# Altium PCB DUT_STM32H753VIT6.PcbDoc
Units mm, origin at the board's own origin, x right, y up, seen from the top; angles counter-clockwise.
Board outline 33 x 90 mm, 2 copper layers (Top Layer, Bottom Layer); 11 components, 93 nets, 288 pads, 0 vias.
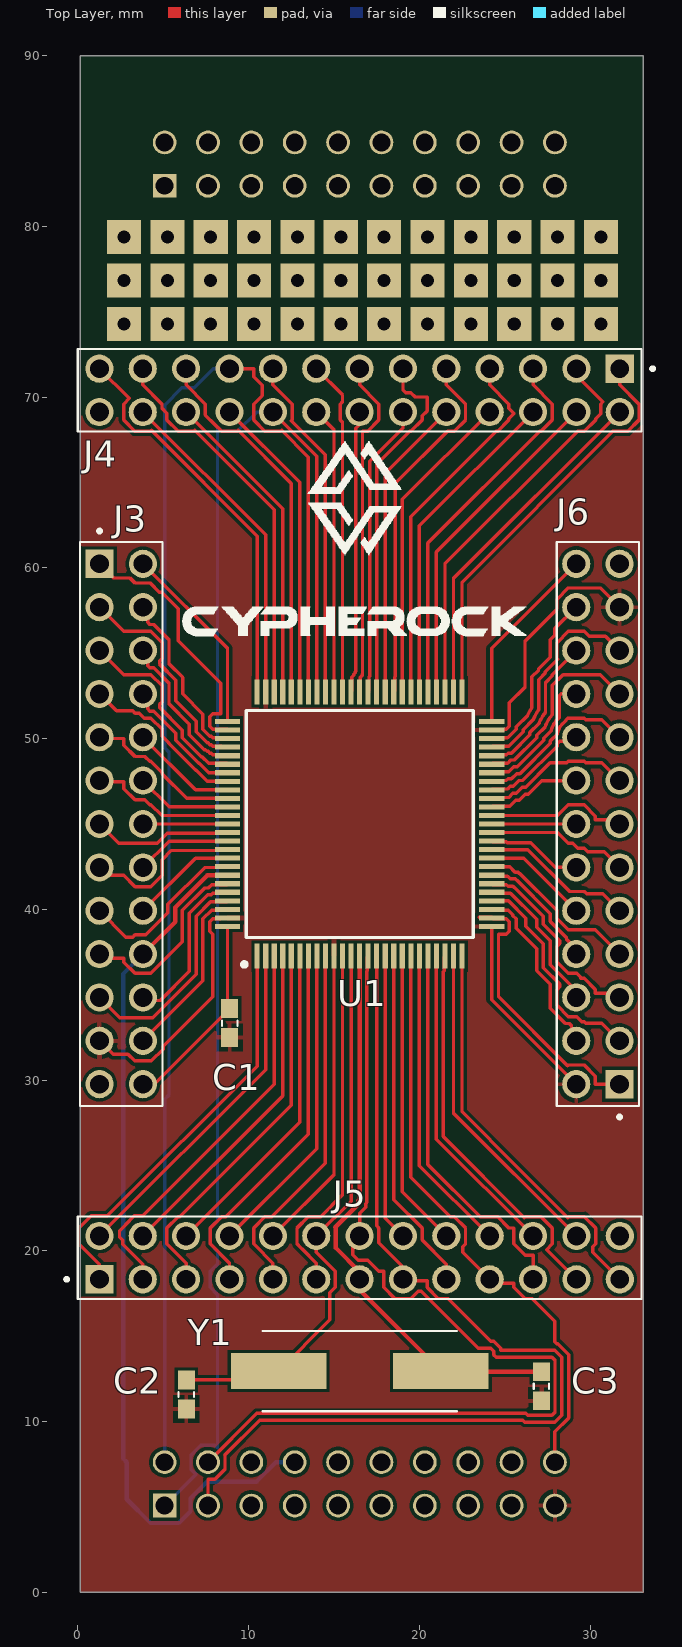
[diagram p0: Top Layer view]
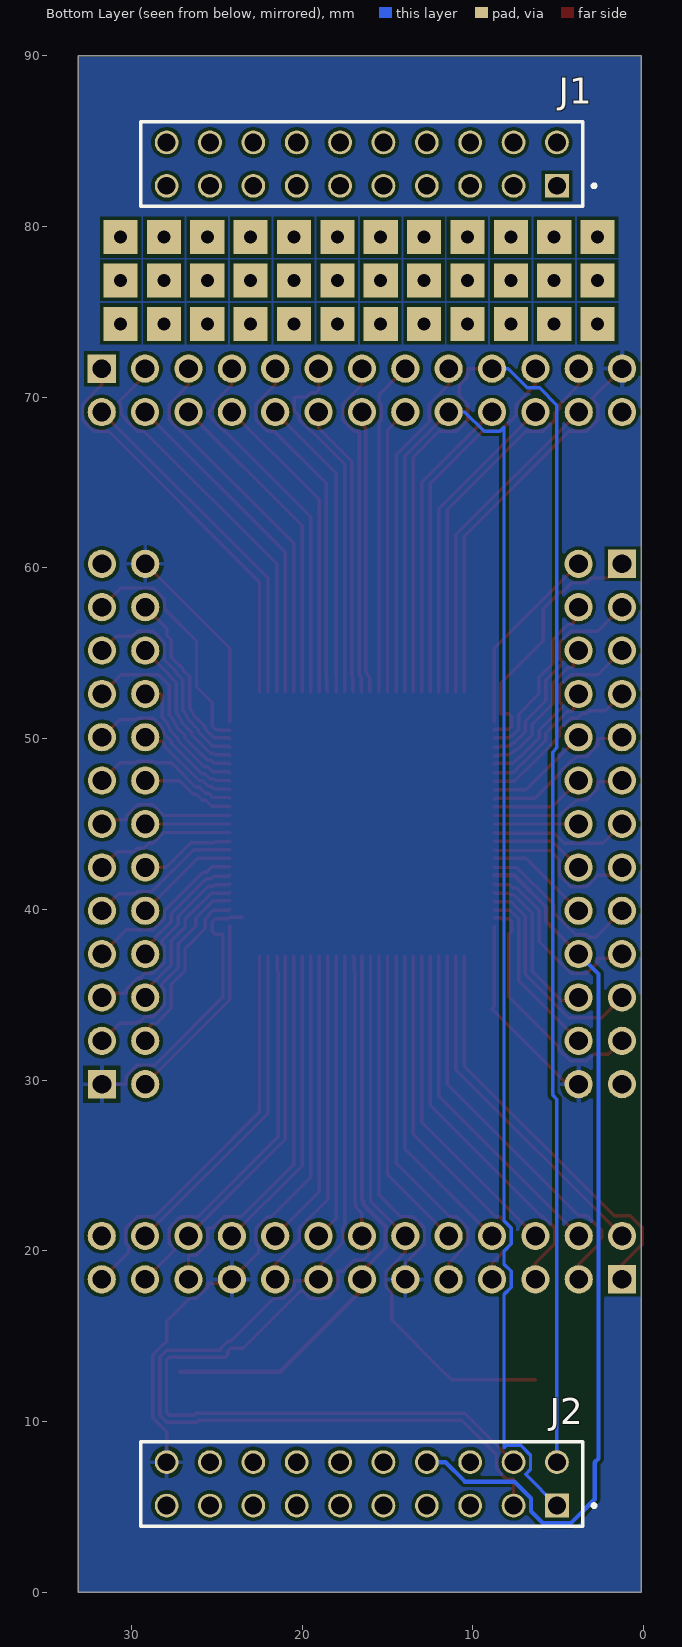
[diagram p1: Bottom Layer view, seen from below]
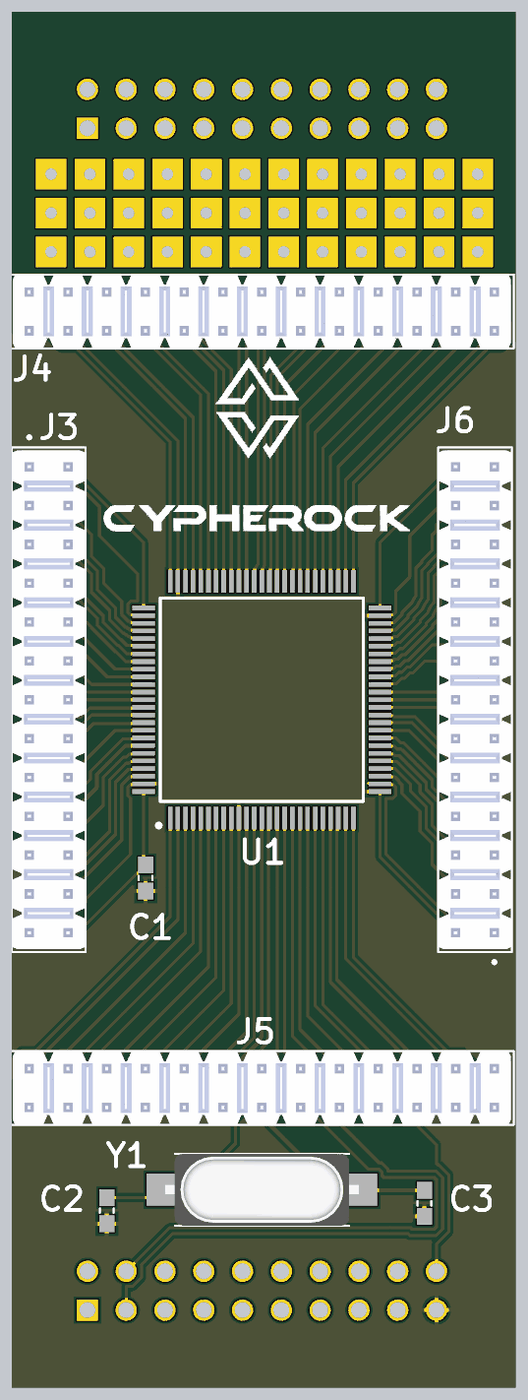
[diagram p2: 3D render of the assembled board from above, using the file's embedded part models]

## Layer stack, top to bottom
Top Solder: solder mask 0.0102, Solder Resist, Dk 3.5
Top Layer: signal copper 0.0356
Dielectric 1: dielectric 0.32, FR-4, Dk 4.8
Bottom Layer: signal copper 0.0356
Bottom Solder: solder mask 0.0102, Solder Resist, Dk 3.5

## Board outline
0.127,0 0.127,90 33.127,90 33.127,0

## Design rules (kind name [scope] priority, off if disabled: settings)
Clearance [All] p1: gap=0.2 ignorepadtopadclearanceinfootprint=FALSE
PolygonConnect [All] p1: connectstyle=Relief reliefconductorwidth=0.254 reliefentries=4 polygonreliefangle="90 Angle" airgapwidth=0.254
RoutingVias [All] p1: holewidth=0.711 width=1.27 viastyle="Through Hole" minholewidth=0.711 minwidth=1.27 maxholewidth=0.711 maxwidth=1.27
SolderMaskExpansion [All] p1: expansion=0.102 istentingtop=FALSE
Width [All] p1: maxlimit=0.254 minlimit=0.2 preferedwidth=0.254 minimp=50.000000 maximp=50.000000 favimp=50.000000
30 further rules are at their usual default settings.

## Components (designator, comment, footprint, x,y, rotation, side; value= is the part's Value field where it differs from the comment)
C1 "0.1uF" CAPC1608X90 8.89,33.337 r270 top
C2 "27pF" CAPC1608X90 6.35,11.589 r90 top
C3 "27pF" CAPC1608X90 27.146,12.065 r90 top
J1 "SSW-110-01-G-D-LL" SAMTEC_SSW-110-01-G-D-LL 5.08,82.38 r180 bottom
J2 "SSW-110-01-G-D-LL" SAMTEC_SSW-110-01-G-D-LL 5.08,5.08 r180 bottom
J3 "77313-818-26LF" AMPHENOL_77313-818-26LF 2.54,45 r270 top locked
J4 "77313-818-26LF" AMPHENOL_77313-818-26LF 16.5,70.4 r180 top
J5 "77313-818-26LF" AMPHENOL_77313-818-26LF 16.5,19.6 r0 top
J6 "77313-818-26LF" AMPHENOL_77313-818-26LF 30.46,45 r90 top
U1 "STM32H753VIT6" QFP50P1600X1600X160-100N 16.5,45 r90 top locked
Y1 "ABLS-8.000MHZ-B2-T" XTAL_ABLS-8.000MHZ-B2-T 16.51,12.954 r0 top

## Footprints (in the part's own frame and the unit in brackets; to place one, negate y for a bottom-side part, rotate by r counter-clockwise, add the part's x,y. Pads: shape width x height; smd on the part's side, far side on the other; paste and mask are expansions set on the pad)
AMPHENOL_77313-818-26LF [mm]
  rect 1.65x1.65 / inner round 1.65 / far side rect 1.65x1.65 hole 1.1: 01(-15.24,-1.27)
  round 1.65 hole 1.1: 02(-15.24,1.27) 03(-12.7,-1.27) 04(-12.7,1.27) 05(-10.16,-1.27) 06(-10.16,1.27) 07(-7.62,-1.27) 08(-7.62,1.27) 09(-5.08,-1.27) 10(-5.08,1.27) 11(-2.54,-1.27) 12(-2.54,1.27) 13(0,-1.27) 14(0,1.27) 15(2.54,-1.27) 16(2.54,1.27) 17(5.08,-1.27) 18(5.08,1.27) 19(7.62,-1.27) 20(7.62,1.27) 21(10.16,-1.27) 22(10.16,1.27) 23(12.7,-1.27) 24(12.7,1.27) 25(15.24,-1.27) 26(15.24,1.27)
  silkscreen extent -17.26,-2.41 16.51,2.41, body extent -16.31,-2.41 16.31,2.41, height 8.37
CAPC1608X90 [mm]
  rect 1.1x1 smd: 1(-0.85,0) 2(0.85,0)
  silkscreen extent -0.15,-0.45 0.15,0.45
QFP50P1600X1600X160-100N [mm]
  rect 1.475x0.3 smd: 1(-7.738,6) 2(-7.738,5.5) 3(-7.738,5) 4(-7.738,4.5) 5(-7.738,4) 6(-7.738,3.5) 7(-7.738,3) 8(-7.738,2.5) 9(-7.738,2) 10(-7.738,1.5) 11(-7.738,1) 12(-7.738,0.5) 13(-7.738,0) 14(-7.738,-0.5) 15(-7.738,-1) 16(-7.738,-1.5) 17(-7.738,-2) 18(-7.738,-2.5) 19(-7.738,-3) 20(-7.738,-3.5) 21(-7.738,-4) 22(-7.738,-4.5) 23(-7.738,-5) 24(-7.738,-5.5) 25(-7.738,-6) 51(7.738,-6) 52(7.738,-5.5) 53(7.738,-5) 54(7.738,-4.5) 55(7.738,-4) 56(7.738,-3.5) 57(7.738,-3) 58(7.738,-2.5) 59(7.738,-2) 60(7.738,-1.5) 61(7.738,-1) 62(7.738,-0.5) 63(7.738,0) 64(7.738,0.5) 65(7.738,1) 66(7.738,1.5) 67(7.738,2) 68(7.738,2.5) 69(7.738,3) 70(7.738,3.5) 71(7.738,4) 72(7.738,4.5) 73(7.738,5) 74(7.738,5.5) 75(7.738,6)
  rect 0.3x1.475 smd: 26(-6,-7.738) 27(-5.5,-7.738) 28(-5,-7.738) 29(-4.5,-7.738) 30(-4,-7.738) 31(-3.5,-7.738) 32(-3,-7.738) 33(-2.5,-7.738) 34(-2,-7.738) 35(-1.5,-7.738) 36(-1,-7.738) 37(-0.5,-7.738) 38(0,-7.738) 39(0.5,-7.738) 40(1,-7.738) 41(1.5,-7.738) 42(2,-7.738) 43(2.5,-7.738) 44(3,-7.738) 45(3.5,-7.738) 46(4,-7.738) 47(4.5,-7.738) 48(5,-7.738) 49(5.5,-7.738) 50(6,-7.738) 76(6,7.738) 77(5.5,7.738) 78(5,7.738) 79(4.5,7.738) 80(4,7.738) 81(3.5,7.738) 82(3,7.738) 83(2.5,7.738) 84(2,7.738) 85(1.5,7.738) 86(1,7.738) 87(0.5,7.738) 88(0,7.738) 89(-0.5,7.738) 90(-1,7.738) 91(-1.5,7.738) 92(-2,7.738) 93(-2.5,7.738) 94(-3,7.738) 95(-3.5,7.738) 96(-4,7.738) 97(-4.5,7.738) 98(-5,7.738) 99(-5.5,7.738) 100(-6,7.738)
  silkscreen extent -8.35,-6.65 6.65,6.87
SAMTEC_SSW-110-01-G-D-LL [mm]
  rect 1.39x1.39 hole 1.04: 01(0,0)
  round 1.39 hole 1.04: 02(0,2.54) 03(-2.54,0) 04(-2.54,2.54) 05(-5.08,0) 06(-5.08,2.54) 07(-7.62,0) 08(-7.62,2.54) 09(-10.16,0) 10(-10.16,2.54) 11(-12.7,0) 12(-12.7,2.54) 13(-15.24,0) 14(-15.24,2.54) 15(-17.78,0) 16(-17.78,2.54) 17(-20.32,0) 18(-20.32,2.54) 19(-22.86,0) 20(-22.86,2.54)
  silkscreen extent -24.39,-1.21 2.27,3.75
XTAL_ABLS-8.000MHZ-B2-T [mm]
  rect 5.6x2.1 smd: 1(-4.75,0) 2(4.75,0)
  silkscreen extent -5.7,-2.35 5.7,2.35, body extent -6.35,-2.35 6.35,2.35, height 4.06

## Part data
C1: library part CC0603MRX5R7BB106, "CAP CER 10UF 16V X5R 0603", Package=None, Availability=Unavailable, MP=CC0603MRX5R7BB106, Price=None
C2 C3: library part CC0603MRX5R7BB106, "0603", Package=None, Availability=Unavailable, MP=CC0603MRX5R7BB106, Price=None
J1 J2: Package=None, Availability=Unavailable, MF="Samtec Inc.", MP=SSW-110-01-G-D-LL, Price=None
J3 J4 J5 J6: "BergStik, Board to Board connector, Unshrouded Header, 2.54 mm Pitch, Vertical, Double Row,Through Hole, 26 Positions", Package=None, Check_prices=https://www.snapeda.com/parts/77313-818-26LF/Amphenol+FCI/view-part/?ref=eda, MF="Amphenol ICC (FCI)", MP=77313-818-26LF, SnapEDA_Link=https://www.snapeda.com/parts/77313-818-26LF/Amphenol+FCI/view-part/?ref=snap
U1: "ARM Microcontrollers - MCU High-performance and DSP with DP-FPU, ARM Cortex-M7 MCU with 2MBytes Flash, 1MB RAM, 400 MHz CPU, Art Accelerator, L1 cache, external memory interface, large set of peripherals including a Crypto accelerator", Manufacturer_Name=STMicroelectronics, Mouser Part Number=511-STM32H753VIT6, Datasheet Link=https://www.st.com/resource/en/datasheet/stm32h753vi.pdf, Geometry.Height=1.6mm, Manufacturer_Part_Number=STM32H753VIT6, Mouser Price/Stock=https://www.mouser.co.uk/ProductDetail/STMicroelectronics/STM32H753VIT6?qs=u4fy%2FsgLU9OfOK8gAGKF5w%3D%3D
Y1: "HC/49US (AT49) SMD LOW PROFILE CRYSTAL", Package="HC49/US Abracon", Availability="In Stock", Check_prices=https://www.snapeda.com/parts/ABLS-8.000MHZ-B2-T/Abracon+LLC/view-part/?ref=eda, MF="Abracon LLC", MP=ABLS-8.000MHZ-B2-T, Price=None, Purchase-URL=https://pricing.snapeda.com/search/part/ABLS-8.000MHZ-B2-T/?ref=eda, SnapEDA_Link=https://www.snapeda.com/parts/ABLS-8.000MHZ-B2-T/Abracon+LLC/view-part/?ref=snap

## Free pads (board coordinates)
  rect 2x2 hole 0.762: 17(2.699,74.295) 17(2.699,76.835) 17(2.699,79.375) 17(5.239,74.295) 17(5.239,76.835) 17(5.239,79.375) 17(7.779,74.295) 17(7.779,76.835) 17(7.779,79.375) 17(10.319,74.295) 17(10.319,76.835) 17(10.319,79.375) 17(12.859,74.295) 17(12.859,76.835) 17(12.859,79.375) 17(15.399,74.295) 17(15.399,76.835) 17(15.399,79.375) 17(17.939,74.295) 17(17.939,76.835) 17(17.939,79.375) 17(20.479,74.295) 17(20.479,76.835) 17(20.479,79.375) 17(23.019,74.295) 17(23.019,76.835) 17(23.019,79.375) 17(25.559,74.295) 17(25.559,76.835) 17(25.559,79.375) 17(28.099,74.295) 17(28.099,76.835) 17(28.099,79.375) 17(30.639,74.295) 17(30.639,76.835) 17(30.639,79.375)

## Nets (pads, with @x,y where several pads share a name; then routed paths per layer and width w, separated by ;. In a path a pad name is that pad's centre, name@x,y a point inside that pad or via, vN(x,y) a via of type N, cw(c..) or ccw(c..) an arc to the next point about the centre after c; other vN are vias at no path point)
3V3: C1.1 J2.20 J3.26 J4.25 J5.11 J5.19 J6.01 J6.26 U1.11 U1.19 U1.27 U1.50 U1.75 U1.100 | length 119.1
  Top Layer w0.2: J4.25 3.005,69.925 2.675,69.596 2.675,68.664 3.334,68.005 4.266,68.005 4.313,68.052 10.5,61.864 U1.75 ; J3.26 4.462,29.76 C1.1 8.762,34.316 U1.100 ; J5.11 13.96,19.279 13.127,20.112 13.048,20.191 12.835,20.404 12.835,21.336 13.494,21.995 14.216,21.995 15.5,23.279 U1.11 ; U1.19 19.5,24.315 21.82,21.995 22.046,21.995 22.705,21.336 22.705,20.404 22.543,20.242 22.543,19.907 J5.19 24.352,18.098 25.535,18.098 25.535,17.864 26.194,17.205 26.61,17.205 27.94,15.875 27.94,14.682 28.057,14.565 28.102,14.565 28.746,13.921 28.746,10.209 27.94,9.403 J2.20 ; 23.495,39.55 24.238,39.55 24.338,39.45 25.1,39.45 25.276,39.274 25.276,38.726 25.1,38.55 24.638,38.55 24.638,34.878 28.677,30.838 28.724,30.885 29.656,30.885 30.315,30.226 30.315,29.76 J6.01 ; U1.50 24.238,55.288 J6.26
GND: J2.17
GNDA: C1.2 C2.1 C3.1 J2.19 J3.23 J4.24 J5.10 J6.02 J6.23 U1.10 U1.26 U1.49 U1.74 U1.99 | length 77
  Top Layer w0.2: J3.23 2.061,31.509 2.934,31.509 3.322,31.121 4.298,31.121 4.989,31.812 4.989,31.973 7.9,34.885 7.9,38.55 7.724,38.726 7.724,39.274 7.9,39.45 8.335,39.45 8.385,39.5 U1.99 ; J4.24 11,61.93 U1.74 ; J5.10 15,24.45 U1.10 ; U1.26 24.238,34.712 J6.02 ; U1.49 24.941,50.5 24.991,50.55 25.1,50.55 25.276,50.726 25.276,52.104 26.188,53.016 26.188,55.715 28.065,57.593 28.065,58.166 28.724,58.825 30.605,58.825 J6.23
NetC2_2: C2.2 J5.12 U1.12 Y1.1 | length 32.6
  Top Layer w0.2: C2.2 11.245,12.439 Y1.1 14.764,15.958 14.764,17.543 15.085,17.864 15.085,18.796 14.718,19.163 13.96,19.921 J5.12 16,22.91 U1.12
NetC3_2: C3.2 J5.13 U1.13 Y1.2 | length 33.4
  Top Layer w0.254: U1.13 16.5,23.009 16.427,22.936 16.427,22.733 15.077,21.383 15.112,21.347 15.112,20.161 16.5,18.773 J5.13 16.5,17.714 Y1.2 21.299,12.915 C3.2
NetJ2_01: J2.01 J4.18 U1.68 | length 87.4
  Top Layer w0.2: J4.18 14,66.55 U1.68
  Bottom Layer w0.2: J2.01 6.916,6.916 6.625,7.208 6.625,8.032 7.208,8.615 8.032,8.615 8.179,8.468 8.179,17.44 7.755,17.864 7.755,18.796 8.179,19.22 8.179,19.98 7.755,20.404 7.755,21.336 8.179,21.76 8.179,68.24 8.414,68.005 9.346,68.005 10.471,69.13 J4.18
NetJ2_02: J2.02 J4.19 U1.69 | length 89.5
  Top Layer w0.2: J4.19 10.295,71.67 10.295,71.204 10.795,70.704 10.795,70.096 10.295,69.596 10.295,68.664 10.954,68.005 11.886,68.005 11.933,68.052 13.5,66.484 U1.69
  Bottom Layer w0.2: J2.02 5.08,28.873 5.335,29.128 5.335,49.203 5.08,49.458 5.08,69.532 6.092,70.545 6.806,70.545 7.931,71.67 J4.19
NetJ2_03: J2.03 J5.15 U1.15 | length 58.9
  Top Layer w0.2: J2.03 7.62,6.625 8.032,6.625 8.615,7.208 8.615,8.032 8.606,8.041 10.643,10.078 26.063,10.078 26.176,9.965 27.936,9.965 28.346,10.375 28.346,12.075 28.346,13.755 27.936,14.165 24.76,14.165 24.76,14.294 24.35,14.704 24.19,14.704 21.689,17.205 21.114,17.205 20.479,17.84 20.455,17.864 20.455,18.256 19.114,18.256 J5.15 19.04,19.064 17.625,20.479 17.625,21.336 17.5,21.461 U1.15
NetJ2_04: J2.04 J5.14 U1.14 | length 58
  Top Layer w0.2: J2.04 10.477,10.477 26.229,10.477 26.342,10.365 27.771,10.365 27.946,10.541 27.946,13.589 27.771,13.765 26.522,13.765 26.511,13.754 24.504,13.754 24.36,13.899 24.36,14.128 24.184,14.304 23.449,14.304 20.11,17.643 19.944,17.643 19.506,17.205 18.574,17.205 17.915,17.864 17.915,18.796 17.625,18.796 16.966,19.455 16.422,19.455 16.108,19.769 16.108,20.478 J5.14 16.5,22.202 16.854,22.556 16.854,22.759 16.927,22.832 16.927,36.377 16.95,36.4 16.95,37.212 U1.14
NetJ2_07: J2.07
NetJ2_08: J2.08 J3.20 U1.94 | length 52.2
  Top Layer w0.254: J3.20 5.698,39.268 5.698,40.114 7.584,42 U1.94
  Bottom Layer w0.254: J3.20 2.648,36.218 2.648,7.829 2.857,7.62 2.857,5.45 4.25,4.058 5.91,4.058 6.598,4.746 6.598,5.503 7.578,6.484 10.469,6.484 11.605,7.62 J2.08
NetJ3_01: J3.01 U1.77 | length 15.3
  Top Layer w0.2: J3.01 2.102,59.408 3.051,59.408 3.344,59.115 4.226,59.115 4.77,58.571 4.913,58.571 4.921,58.563 5.231,58.253 5.239,58.246 5.469,58.015 5.556,57.928 5.866,57.618 5.874,57.611 5.874,55.721 8.362,53.233 8.362,51.45 7.9,51.45 7.724,51.274 7.724,50.726 7.9,50.55 8.762,50.55 U1.77
NetJ3_02: J3.02 U1.76 | length 11.3
  Top Layer w0.2: J3.02 8.762,55.288 U1.76
NetJ3_03: J3.03 U1.79 | length 12.9
  Top Layer w0.2: J3.03 2.685,56.285 4.276,56.285 4.935,55.626 4.935,54.694 4.78,54.539 4.78,54.373 5.735,53.417 5.735,52.209 6.924,51.019 6.924,50.394 7.569,49.75 7.635,49.75 7.735,49.65 7.8,49.65 7.9,49.55 8.394,49.55 8.444,49.5 U1.79
NetJ3_04: J3.04 U1.78 | length 10.4
  Top Layer w0.2: J3.04 4.087,57.423 4.087,56.818 4.22,56.685 4.442,56.685 5.335,55.792 5.335,54.383 6.135,53.583 6.135,52.627 7.324,51.437 7.324,50.56 7.735,50.15 7.8,50.15 7.9,50.05 8.712,50.05 U1.78
NetJ3_05: J3.05 U1.81 | length 11.5
  Top Layer w0.2: J3.05 2.685,53.745 4.276,53.745 4.935,53.086 4.935,52.154 4.78,51.999 4.78,51.833 6.125,50.488 6.125,50.063 7.237,48.95 7.268,48.95 7.668,48.55 8.712,48.55 U1.81
NetJ3_06: J3.06 U1.80 | length 8.9
  Top Layer w0.2: J3.06 4.087,54.883 4.087,54.278 4.22,54.145 4.442,54.145 5.335,53.252 5.335,52.043 6.525,50.854 6.525,50.229 7.403,49.35 7.469,49.35 7.569,49.25 7.635,49.25 7.735,49.15 7.8,49.15 7.9,49.05 8.417,49.05 8.468,49 U1.80
NetJ3_07: J3.07 U1.83 | length 9.9
  Top Layer w0.2: J3.07 2.261,51.629 3.21,51.629 3.344,51.495 3.591,51.495 3.881,51.205 4.276,51.205 4.935,50.546 4.935,50.151 5.325,49.762 5.325,49.732 6.906,48.15 6.936,48.15 7.586,47.5 U1.83
NetJ3_08: J3.08 U1.82 | length 7.5
  Top Layer w0.2: J3.08 4.087,52.343 4.087,51.738 4.22,51.605 4.442,51.605 5.725,50.322 5.725,49.897 7.072,48.55 7.102,48.55 7.652,48 U1.82
NetJ3_09: J3.09 U1.85 | length 9.3
  Top Layer w0.2: J3.09 1.344,50.006 2.685,50.006 2.685,49.614 3.344,48.955 3.909,48.955 4.199,48.665 4.276,48.665 4.935,48.006 4.935,47.929 6.364,46.5 U1.85 U1.85@8.712,46.45
NetJ3_10: J3.10 U1.84 | length 6.2
  Top Layer w0.2: J3.10 6.89,47 U1.84
NetJ3_11: J3.11 U1.87 | length 8.6
  Top Layer w0.2: J3.11 1.344,47.466 2.685,47.466 2.685,47.074 3.344,46.415 3.909,46.415 4.199,46.125 4.276,46.125 4.901,45.5 U1.87
NetJ3_12: J3.12 U1.86 | length 5.6
  Top Layer w0.2: J3.12 5.35,46 U1.86
NetJ3_13: J3.13 U1.89 | length 8.2
  Top Layer w0.2: J3.13 2.395,43.875 4.659,43.875 5.234,44.45 8.007,44.45 8.712,44.45 U1.89
NetJ3_14: J3.14 U1.88 | length 5
  Top Layer w0.2: J3.14 U1.88
NetJ3_15: J3.15 U1.91 | length 9.4
  Top Layer w0.2: J3.15 1.736,41.994 2.685,41.994 3.344,41.335 4.276,41.335 4.935,41.994 4.935,42.904 5.481,43.45 8.007,43.45 8.712,43.45 U1.91
NetJ3_16: J3.16 U1.90 | length 5.6
  Top Layer w0.2: J3.16 5.35,44 U1.90
NetJ3_17: J3.17 U1.93 | length 10.1
  Top Layer w0.2: J3.17 2.813,38.377 3.216,38.377 3.344,38.505 3.986,38.505 5.271,39.79 5.271,40.291 7.43,42.45 8.712,42.45 U1.93
NetJ3_18: J3.18 U1.92 | length 6.2
  Top Layer w0.2: J3.18 6.89,43 U1.92
NetJ3_19: J3.19 U1.95 | length 11.3
  Top Layer w0.2: J3.19 1.502,37.148 2.685,37.148 2.685,36.914 3.344,36.255 4.276,36.255 6.125,38.104 6.125,39.937 7.437,41.25 7.635,41.25 7.835,41.45 8.712,41.45 U1.95
NetJ3_21: J3.21 U1.97 | length 12.8
  Top Layer w0.2: J3.21 2.449,33.661 4.382,33.661 6.924,36.204 6.924,39.606 7.769,40.45 8.007,40.45 8.712,40.45 U1.97
NetJ3_22: J3.22 U1.96 | length 9.6
  Top Layer w0.2: J3.22 3.987,34.663 4.818,34.663 6.525,36.37 6.525,39.771 7.603,40.85 7.8,40.85 7.9,40.95 8.007,40.95 8.712,40.95 U1.96
NetJ3_24: J3.24 U1.98 | length 10.3
  Top Layer w0.2: J3.24 7.324,35.814 7.324,39.44 7.835,39.95 8.712,39.95 U1.98
NetJ4_01: J4.01 U1.51 | length 24.2
  Top Layer w0.2: U1.51 22.5,59.171 31.334,68.005 32.206,68.005 32.865,68.664 32.865,69.596 31.74,70.721 J4.01
NetJ4_02: J4.02 U1.52 | length 20.4
  Top Layer w0.2: U1.52 22,59.39 J4.02
NetJ4_03: J4.03 U1.53 | length 23.6
  Top Layer w0.2: U1.53 21.5,60.235 29.27,68.005 29.666,68.005 30.325,68.664 30.325,68.742 30.615,69.033 30.615,69.596 30.754,69.735 29.2,71.289 J4.03
NetJ4_04: J4.04 U1.54 | length 19.8
  Top Layer w0.2: U1.54 21,60.93 J4.04
NetJ4_05: J4.05 U1.55 | length 22.5
  Top Layer w0.2: U1.55 20.5,61.457 27.047,68.005 27.126,68.005 27.785,68.664 27.785,69.596 26.66,70.721 J4.05
NetJ4_06: J4.06 U1.56 | length 19.2
  Top Layer w0.2: U1.56 20,62.47 J4.06
NetJ4_07: J4.07 U1.57 | length 22.1
  Top Layer w0.2: U1.57 19.5,62.997 24.507,68.005 24.586,68.005 25.245,68.664 25.245,68.742 25.535,69.033 25.535,69.056 25.245,69.346 25.245,69.596 24.12,70.721 J4.07
NetJ4_08: J4.08 U1.58 | length 18.5
  Top Layer w0.2: U1.58 19,64.01 J4.08
NetJ4_09: J4.09 U1.59 | length 21.4
  Top Layer w0.2: U1.59 18.55,52.788 18.55,53.6 18.6,53.65 18.6,64.955 21.65,68.005 22.046,68.005 22.705,68.664 22.705,69.596 21.58,70.721 J4.09
NetJ4_10: J4.10 U1.60 | length 17.9
  Top Layer w0.2: U1.60 18,65.55 J4.10
NetJ4_11: J4.11 U1.61 | length 21.4
  Top Layer w0.2: U1.61 17.5,66.078 19.427,68.005 19.506,68.005 20.165,68.664 20.165,68.901 20.455,69.191 20.455,70.009 19.752,70.009 19.506,70.255 19.209,70.255 19.04,70.424 J4.11
NetJ4_12: J4.12 U1.62 | length 17.2
  Top Layer w0.2: U1.62 17.05,52.788 17.05,53.6 17.1,53.65 17.1,66.243 19.04,68.183 J4.12
NetJ4_13: J4.13 U1.63 | length 20
  Top Layer w0.2: U1.63 16.55,52.788 16.55,53.6 16.65,53.7 16.65,53.765 16.669,53.784 16.669,68.005 16.966,68.005 17.625,68.664 17.625,69.596 17.575,69.645 16.5,70.721 J4.13
NetJ4_14: J4.14 U1.64 | length 16.6
  Top Layer w0.2: U1.64 16.05,52.788 16.05,53.6 16.15,53.7 16.15,53.765 16.25,53.865 16.25,53.931 16.269,53.95 16.269,68.171 16.5,68.402 J4.14
NetJ4_15: J4.15 U1.65 | length 19.7
  Top Layer w0.2: J4.15 15.5,70.13 15.5,69.721 15.375,69.596 15.375,68.664 15.5,68.539 U1.65
NetJ4_16: J4.16 U1.66 | length 16.8
  Top Layer w0.2: J4.16 15,68.09 U1.66
NetJ4_17: J4.17 U1.67 | length 20.2
  Top Layer w0.2: J4.17 11.42,70.721 12.545,69.596 12.545,68.664 12.501,68.62 14.5,66.621 U1.67
NetJ4_20: J4.20 U1.70 | length 18.1
  Top Layer w0.2: J4.20 13,65.01 U1.70
NetJ4_21: J4.21 U1.71 | length 22.1
  Top Layer w0.2: J4.21 6.34,70.721 7.465,69.596 7.465,68.954 8.047,68.372 8.414,68.005 9.346,68.005 9.393,68.052 12.5,64.944 U1.71
NetJ4_22: J4.22 U1.72 | length 18.7
  Top Layer w0.2: J4.22 12,63.47 U1.72
NetJ4_23: J4.23 U1.73 | length 22.8
  Top Layer w0.2: J4.23 3.8,70.721 4.925,69.596 4.925,69.346 5.215,69.056 5.215,68.664 5.874,68.005 6.806,68.005 6.853,68.052 11.5,63.404 U1.73
NetJ5_01: J5.01 U1.1 | length 24.3
  Top Layer w0.2: J5.01 1.26,19.203 0.081,20.382 0.081,21.358 0.772,22.049 1.729,22.049 10.5,30.82 U1.1
NetJ5_02: J5.02 U1.2 | length 20.4
  Top Layer w0.2: J5.02 11,30.61 U1.2
NetJ5_03: J5.03 U1.3 | length 23.5
  Top Layer w0.2: J5.03 3.8,19.203 2.621,20.382 2.621,20.614 2.439,20.796 2.439,21.171 2.776,21.508 2.776,21.513 3.312,22.049 3.793,22.049 11.5,29.756 U1.3
NetJ5_04: J5.04 U1.4 | length 19.8
  Top Layer w0.2: J5.04 12,29.07 U1.4
NetJ5_05: J5.05 U1.5 | length 22.5
  Top Layer w0.2: J5.05 6.34,19.279 5.215,20.404 5.215,21.336 5.874,21.995 5.961,21.995 12.5,28.534 U1.5
NetJ5_06: J5.06 U1.6 | length 19.2
  Top Layer w0.2: J5.06 13,27.53 U1.6
NetJ5_07: J5.07 U1.7 | length 21.9
  Top Layer w0.2: J5.07 8.88,19.279 7.755,20.404 7.755,21.336 8.414,21.995 8.66,21.995 13.5,26.835 U1.7
NetJ5_08: J5.08 U1.8 | length 18.5
  Top Layer w0.2: J5.08 14,25.99 U1.8
NetJ5_09: J5.09 U1.9 | length 21.4
  Top Layer w0.2: J5.09 11.42,19.279 10.349,20.35 10.295,20.404 10.295,21.336 10.954,21.995 11.359,21.995 14.5,25.136 U1.9
NetJ5_16: J5.16 U1.16 | length 16.8
  Top Layer w0.2: U1.16 18,21.91 J5.16
NetJ5_17: J5.17 U1.17 | length 20.2
  Top Layer w0.2: U1.17 18.5,23.001 20.165,21.336 20.165,20.634 21.58,19.219 J5.17
NetJ5_18: J5.18 U1.18 | length 17.5
  Top Layer w0.2: U1.18 19,23.45 J5.18
NetJ5_20: J5.20 U1.20 | length 18.1
  Top Layer w0.2: U1.20 20,24.99 J5.20
NetJ5_21: J5.21 U1.21 | length 22.5
  Top Layer w0.2: U1.21 20.5,25.056 23.561,21.995 24.586,21.995 25.245,21.336 25.535,21.336 25.535,20.404 26.194,19.745 26.66,19.745 J5.21
NetJ5_22: J5.22 U1.22 | length 18.7
  Top Layer w0.2: U1.22 21,26.53 J5.22
NetJ5_23: J5.23 U1.23 | length 23.1
  Top Layer w0.2: U1.23 21.45,37.212 21.45,36.4 21.4,36.35 21.4,26.696 26.147,21.948 26.194,21.995 27.126,21.995 27.785,21.336 27.785,20.404 27.455,20.075 J5.23
NetJ5_24: J5.24 U1.24 | length 19.4
  Top Layer w0.2: U1.24 22,28.07 J5.24
NetJ5_25: J5.25 U1.25 | length 23.5
  Top Layer w0.2: U1.25 22.5,28.136 25.794,24.842 28.687,21.948 28.734,21.995 29.666,21.995 30.325,21.336 30.325,20.404 30.162,20.242 30.162,19.907 J5.25
NetJ6_03: J6.03 U1.29 | length 12.9
  Top Layer w0.2: U1.29 25.223,40.5 26.244,39.479 26.244,39.013 27.265,37.991 27.265,36.583 28.22,35.627 28.22,35.461 28.065,35.306 28.065,34.374 28.724,33.715 29.21,33.715 29.5,33.425 29.656,33.425 29.743,33.337 30.692,33.337 J6.03
NetJ6_04: J6.04 U1.28 | length 10.4
  Top Layer w0.2: U1.28 24.288,39.95 25.207,39.95 25.482,39.674 25.482,39.633 25.676,39.44 25.676,38.894 26.865,37.704 26.865,36.417 27.665,35.617 27.665,34.208 28.558,33.315 28.78,33.315 28.913,33.182 28.913,32.577 J6.04
NetJ6_05: J6.05 U1.31 | length 11.6
  Top Layer w0.2: U1.31 24.288,41.45 25.1,41.45 25.2,41.35 25.484,41.35 25.534,41.3 25.554,41.3 27.265,39.589 27.265,39.123 28.22,38.167 28.22,38.001 28.065,37.846 28.065,36.914 28.724,36.255 29.223,36.255 29.457,36.021 29.457,35.965 29.656,35.965 30.315,35.306 30.315,35.09 31.48,35.09 J6.05
NetJ6_06: J6.06 U1.30 | length 8.8
  Top Layer w0.2: U1.30 24.288,40.95 24.993,40.95 25.338,40.95 26.865,39.423 26.865,38.957 27.665,38.157 27.665,36.748 29.19,35.223 J6.06
NetJ6_07: J6.07 U1.33 | length 9.9
  Top Layer w0.2: U1.33 25.286,42.5 25.603,42.183 25.782,42.183 25.865,42.1 25.885,42.1 28.065,39.92 28.065,39.454 28.724,38.795 30.315,38.795 J6.07
NetJ6_08: J6.08 U1.32 | length 7.4
  Top Layer w0.2: U1.32 24.288,41.95 24.993,41.95 25.165,41.95 25.333,41.783 25.617,41.783 25.699,41.7 25.72,41.7 27.665,39.755 27.665,39.288 28.62,38.333 28.62,38.259 29.19,37.69 J6.08
NetJ6_09: J6.09 U1.35 | length 9
  Top Layer w0.2: U1.35 26.35,43.5 28.805,41.045 29.656,41.045 29.794,40.907 30.743,40.907 J6.09
NetJ6_10: J6.10 U1.34 | length 6.2
  Top Layer w0.2: U1.34 26.11,43 J6.10
NetJ6_11: J6.11 U1.37 | length 8.3
  Top Layer w0.2: U1.37 28.099,44.5 28.724,43.875 28.991,43.875 29.281,43.585 29.656,43.585 29.874,43.367 30.823,43.367 J6.11
NetJ6_12: J6.12 U1.36 | length 5.6
  Top Layer w0.2: U1.36 24.288,43.95 25.1,43.95 25.15,43.9 26.516,43.9 27.956,42.46 J6.12
NetJ6_13: J6.13 U1.39 | length 8.3
  Top Layer w0.2: U1.39 28.099,45.5 28.724,46.125 29.656,46.125 30.315,45.466 30.315,45.244 31.486,45.244 J6.13
NetJ6_14: J6.14 U1.38 | length 5
  Top Layer w0.2: U1.38 J6.14
NetJ6_15: J6.15 U1.41 | length 8.9
  Top Layer w0.2: U1.41 24.288,46.55 24.993,46.55 25.231,46.55 25.481,46.8 25.678,46.8 26.028,47.15 26.225,47.15 27.653,48.578 28.637,48.578 28.724,48.665 29.656,48.665 29.743,48.578 30.692,48.578 J6.15
NetJ6_16: J6.16 U1.40 | length 5.6
  Top Layer w0.2: U1.40 24.288,46.05 25.297,46.05 25.647,46.4 25.844,46.4 26.194,46.75 26.391,46.75 27.181,47.54 J6.16
NetJ6_17: J6.17 U1.43 | length 9.7
  Top Layer w0.2: U1.43 24.288,47.55 25.1,47.55 25.2,47.65 25.397,47.65 25.697,47.95 25.894,47.95 27.675,49.732 27.675,49.863 28.081,50.268 cw(c29.19,50.08) 28.519,50.983 28.587,51.051 28.587,51.089 28.703,51.205 29.656,51.205 29.715,51.146 29.743,51.117 30.692,51.117 J6.17
NetJ6_18: J6.18 U1.42 | length 6.3
  Top Layer w0.2: U1.42 24.288,47.05 25.165,47.05 25.315,47.2 25.512,47.2 25.862,47.55 26.06,47.55 28.075,49.566 28.075,49.697 28.229,49.85 28.96,49.85 J6.18
NetJ6_19: J6.19 U1.45 | length 11.3
  Top Layer w0.2: U1.45 24.288,48.55 25.165,48.55 25.365,48.75 25.562,48.75 26.875,50.063 26.875,50.194 27.361,50.68 cw(c29.19,50.08) 27.787,51.399 27.787,53.118 28.414,53.745 30.605,53.745 J6.19
NetJ6_20: J6.20 U1.44 | length 7.8
  Top Layer w0.2: U1.44 24.288,48.05 25.231,48.05 25.531,48.35 25.728,48.35 27.275,49.897 27.275,50.029 27.715,50.469 cw(c29.19,50.08) 28.15,51.195 28.187,51.233 28.187,52.503 28.305,52.62 J6.20
NetJ6_21: J6.21 U1.47 | length 12.7
  Top Layer w0.2: U1.47 24.288,49.55 25.231,49.55 26.076,50.394 26.076,50.526 26.672,51.123 cw(c29.19,50.08) 26.987,51.685 26.987,53.45 27.381,53.843 27.381,53.917 28.112,54.647 28.065,54.694 28.065,55.626 28.724,56.285 29.656,56.285 29.953,55.988 30.902,55.988 J6.21
NetJ6_22: J6.22 U1.46 | length 8.8
  Top Layer w0.2: U1.46 24.288,49.05 25.1,49.05 25.2,49.15 25.397,49.15 26.475,50.229 26.475,50.36 27.014,50.898 cw(c29.19,50.08) 27.387,51.549 27.387,53.284 27.781,53.678 27.781,53.751 J6.22
NetJ6_24: J6.24 U1.48 | length 10.2
  Top Layer w0.2: U1.48 24.288,50.05 25.165,50.05 25.676,50.56 25.676,50.691 26.335,51.351 cw(c29.19,50.08) 26.588,51.81 26.588,53.615 26.981,54.009 26.981,54.083 27.665,54.766 27.665,54.86 27.665,55.792 27.94,56.067 27.94,56.45 J6.24
pads on no net: J1.01 J1.02 J1.03 J1.04 J1.05 J1.06 J1.07 J1.08 J1.09 J1.10 J1.11 J1.12 J1.13 J1.14 J1.15 J1.16 J1.17 J1.18 J1.19 J1.20 J2.05 J2.06 J2.09 J2.10 J2.11 J2.12 J2.13 J2.14 J2.15 J2.16 J2.18 J3.25 J4.26 J5.26 J6.25

## Polygon pours and split planes (outlines as drawn)
3V3 on Bottom Layer "3V3_L02_P001" (solid, remove dead copper, pour order 1): 0.127,89.916 0.127,0 33.147,0 33.147,89.916
GNDA on Top Layer "GNDA_L01_P000" (solid, remove dead copper, pour order 0): 0.127,89.916 0.127,0 33.147,0 33.147,89.916

## Silkscreen, mask and mechanical layers (free items; w line width, h text height)
Top Overlay:
  drawing of 11 lines, arcs and shapes, not listed